# Altium PCB DoubleCam.PcbDoc
Units mil, origin at the board's own origin, x right, y up, seen from the top; angles counter-clockwise.
Board outline 2473.21 x 1456.69 mil, 2 copper layers (Top Layer, Bottom Layer); 22 components, 39 nets, 134 pads, 256 vias.
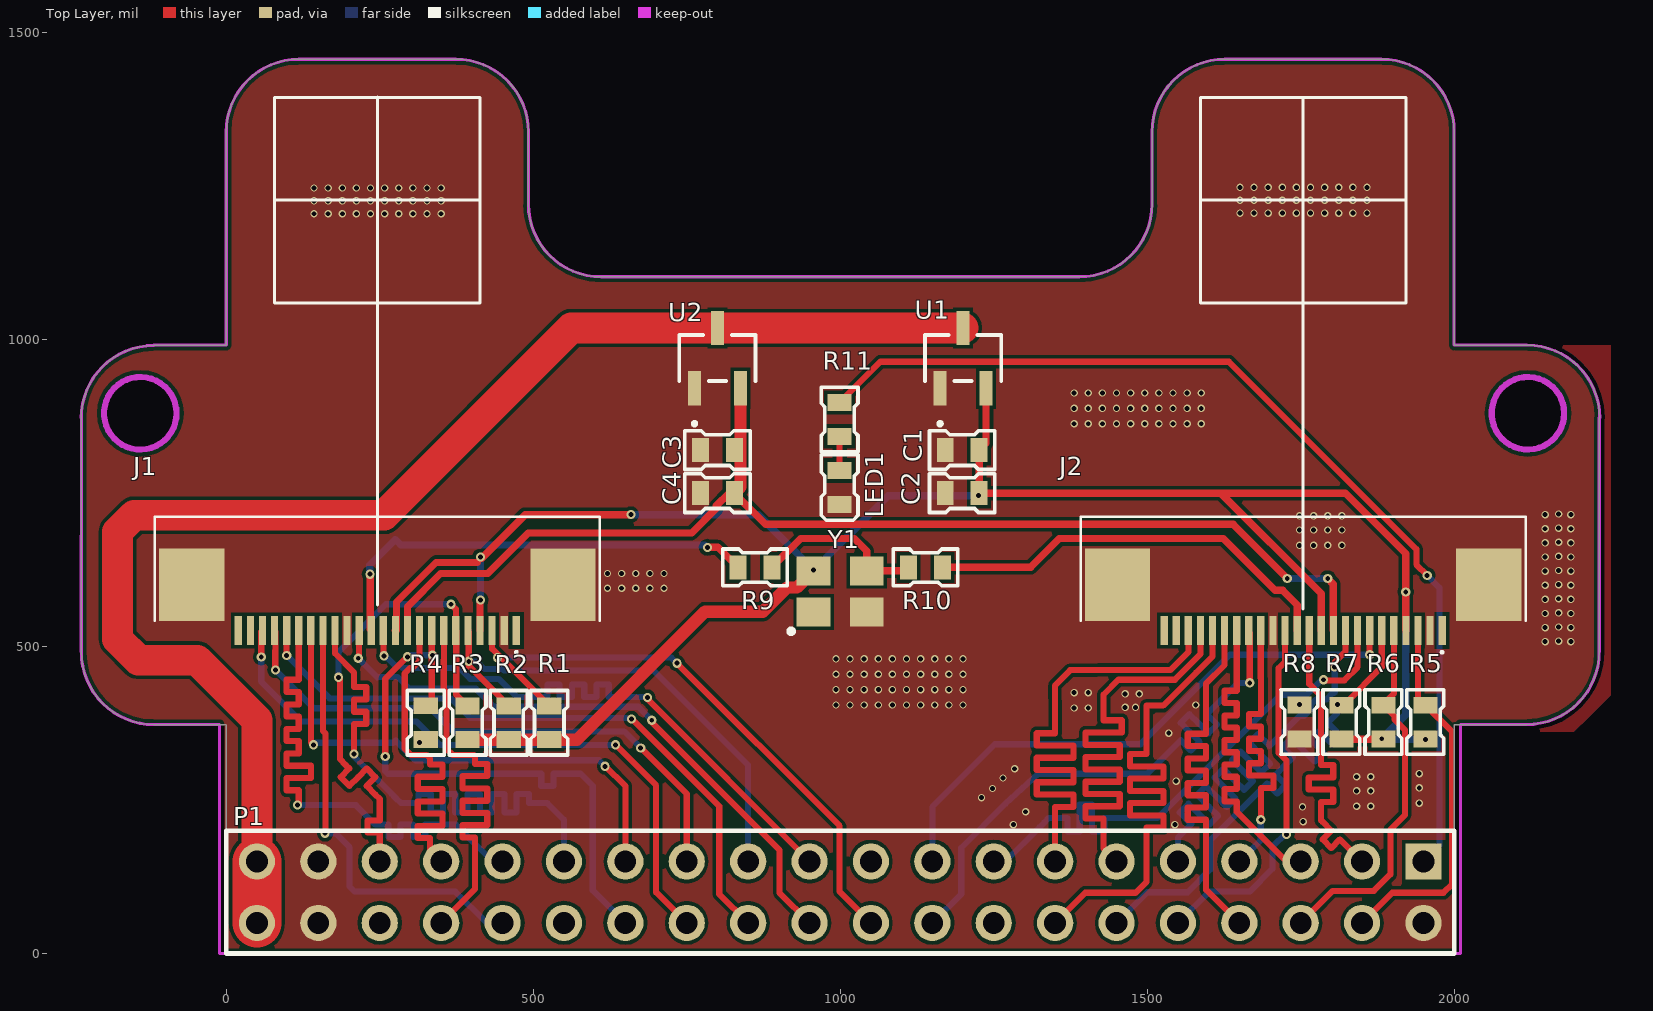
[diagram p0: Top Layer view]
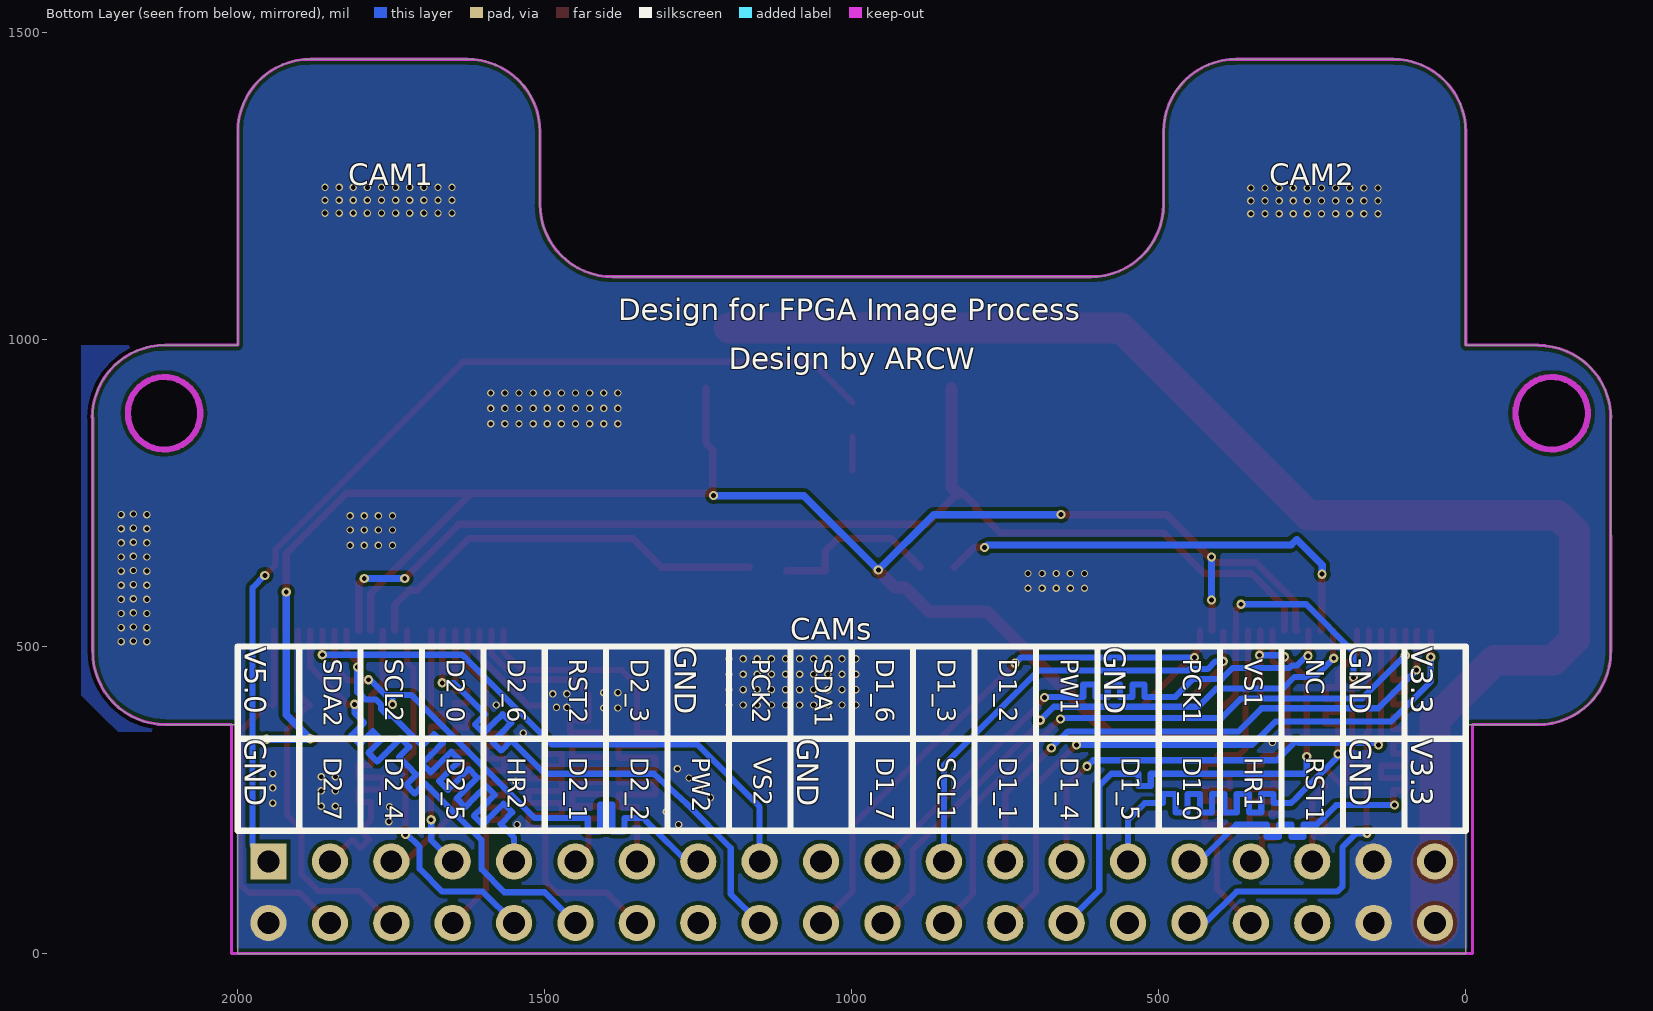
[diagram p1: Bottom Layer view, seen from below]
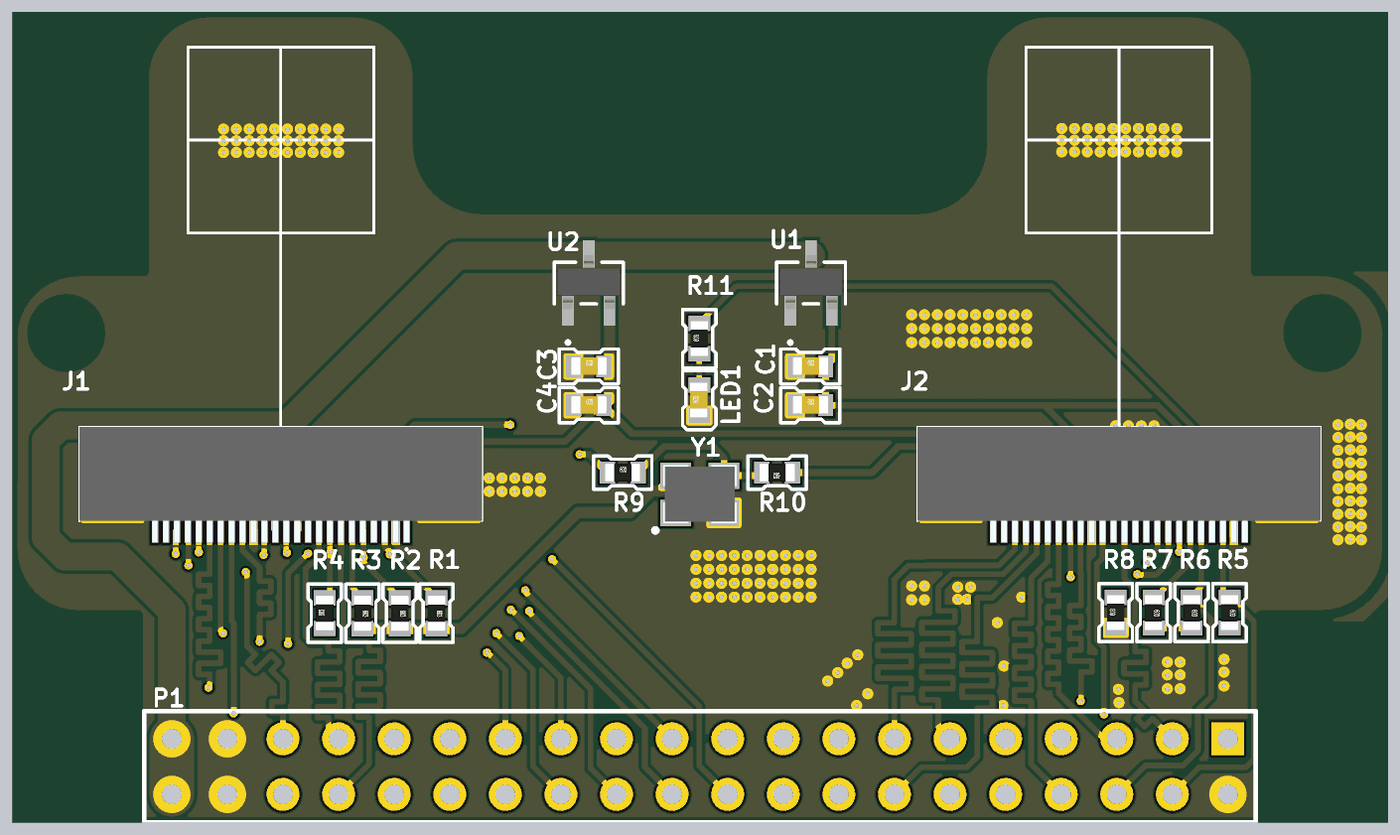
[diagram p2: 3D render of the assembled board from above, using the file's embedded part models]

## Layer stack, top to bottom
Top Solder: solder mask 0.4, Solder Resist, Dk 3.5
Top Layer: signal copper 1.4
Dielectric 1: dielectric 12.6, FR-4, Dk 4.8
Bottom Layer: signal copper 1.4
Bottom Solder: solder mask 0.4, Solder Resist, Dk 3.5

## Board outline
-117.89,372.89 cw(c-117.89,491) -236,491 -236.18,491 -235.98,872.43 -236.22,872.43 cw(c-118.11,872.43) -118.11,990.55 -118.11,990.91 0,990.91 0,1338.58 cw(c118.11,1338.58) 118.11,1456.69 374.02,1456.69 cw(c374.02,1338.58) 492.13,1338.58 492.13,1220.47 ccw(c610.24,1220.47) 610.24,1102.36 1389.76,1102.36 ccw(c1389.76,1220.47) 1507.87,1220.47 1507.87,1338.58 cw(c1625.99,1338.58) 1625.99,1456.69 1881.89,1456.69 cw(c1881.89,1338.58) 2000,1338.58 2000,990.91 2118.88,990.91 cw(c2118.88,872.8) 2236.99,872.8 2236.22,872.8 2236.22,491.11 2236.11,491.11 cw(c2118,491.11) 2118,373 2000,373 2000,0 0,0 0,373
cut-out: -140,820.94 cw(c-140,880) -199.06,880 cw(c-140,880) -140,939.06 cw(c-140,880) -80.94,880 cw(c-140,880)
cut-out: 2060.94,880 ccw(c2120,880) 2120,820.94 ccw(c2120,880) 2179.06,880 ccw(c2120,880) 2120,939.06 ccw(c2120,880)

## Design rules (kind name [scope] priority, off if disabled: settings)
Clearance [All] p1: gap=6 ignorepadtopadclearanceinfootprint=FALSE except(0: Arc-Hole Track-Hole SMDPad-Hole THPad-Hole Via-Hole Fill-Hole Poly-Hole Region-Hole Text-Hole)
PlaneConnect [All] p1: planeconnectstyle=Relief reliefexpansion=20 reliefentries=4 reliefconductorwidth=6 reliefairgap=10
PolygonConnect [All] p1: connectstyle=Direct reliefconductorwidth=10 reliefentries=4 polygonreliefangle="90 Angle" airgapwidth=10
RoutingTopology RoutingTopology_1 [All] p1: topology=Shortest
RoutingTopology [All] p2: topology=Shortest
RoutingVias [All] p1: holewidth=8 width=12 viastyle="Through Hole" minholewidth=6 minwidth=12 maxholewidth=28 maxwidth=50
SolderMaskExpansion [All] p1: expansion=4
Width [All] p1: maxlimit=200 minlimit=6 preferedwidth=10 minimp=50.000000 maximp=50.000000 favimp=50.000000
28 further rules are at their usual default settings.

## Classes and differential pairs
net class OV2: OV2_D0 OV2_D1 OV2_D2 OV2_D3 OV2_D4 OV2_D5 OV2_D6 OV2_D7 OV2_HREF OV2_PCLK OV2_PWDN OV2_RESET OV2_VSYNC
net class OV1: OV1_D0 OV1_D1 OV1_D2 OV1_D3 OV1_D4 OV1_D5 OV1_D6 OV1_D7 OV1_HREF OV1_PCLK OV1_PWDN OV1_RESET OV1_VSYNC

## Components (designator, comment, footprint, x,y, rotation, side; value= is the part's Value field where it differs from the comment)
C1 "Cap" 0603c 1198.58,820 r0 top
C2 "Cap" 0603c 1198.58,750 r0 top
C3 "Cap" 0603c 799.94,820 r0 top
C4 "Cap" 0603c 799.94,750 r0 top
J1 "FFC-24pin" FPC-24Pin 246,600 r180 top
J2 "FFC-24pin" FPC-24Pin 1754,600 r180 top
LED1 "red" 0603D 999,759 r90 top
P1 "Header 20X2" HDR2X20 1950,150 r180 top
R1 "Res1" 0603R 526,376 r270 top
R2 "Res1" 0603R 460,376 r270 top
R3 "Res1" 0603R 393,376 r270 top
R4 "Res1" 0603R 325,376 r90 top
R5 "Res1" 0603R 1953,377 r270 top
R6 "Res1" 0603R 1884.67,377 r270 top
R7 "Res1" 0603R 1816.33,377 r270 top
R8 "Res1" 0603R 1748,377 r90 top
R9 "Res1" 0603R 861,629 r0 top
R10 "Res1" 0603R 1139,629 r180 top
R11 "Res1" 0603R 999,870 r90 top
U1 "XC6206P282MR-G" SOT-23_TOR-M 1200,970 r0 top
U2 "XC6206P152MR-G" SOT-23_TOR-M 800,970 r0 top
Y1 "12MHz" X3225 1000,590 r0 top

## Footprints (in the part's own frame and the unit in brackets; to place one, negate y for a bottom-side part, rotate by r counter-clockwise, add the part's x,y. Pads: shape width x height; smd on the part's side, far side on the other; paste and mask are expansions set on the pad)
0603c [mm]
  rect 0.7x1 smd: 1(-0.699,0) 2(0.701,0)
  silkscreen extent -1.35,-0.8 1.35,0.8, body extent -0.79,-0.38 0.81,0.42, height 0.3
0603D [mm]
  rect 0.7x1 smd: 1(-0.699,0) 2(0.701,0)
  silkscreen extent -1.35,-0.76 1.35,0.76, body extent -0.79,-0.38 0.81,0.42, height 0.3
0603R [mm]
  rect 0.7x1 smd: 1(-0.699,0) 2(0.701,0)
  silkscreen extent -1.33,-0.76 1.33,0.76, body extent -0.8,-0.4 0.8,0.4, height 0.3
FPC-24Pin [mm]
  rect 0.3x1.2 smd: 1(-5.75,1.875) 2(-5.25,1.875) 3(-4.75,1.875) 4(-4.25,1.875) 5(-3.75,1.875) 6(-3.25,1.875) 7(-2.75,1.875) 8(-2.25,1.875) 9(-1.75,1.875) 10(-1.25,1.875) 11(-0.75,1.875) 12(-0.25,1.875) 13(0.25,1.875) 14(0.75,1.875) 15(1.25,1.875) 16(1.75,1.875) 17(2.25,1.875) 18(2.75,1.875) 19(3.25,1.875) 20(3.75,1.875) 21(4.25,1.875) 22(4.75,1.875) 23(5.25,1.875) 24(5.75,1.875)
  rect 2.7x3 smd: 25(-7.68,-0.025) 26(7.68,-0.025)
  silkscreen extent -9.2,-2.83 9.2,2.82, body extent -9.2,-2.83 9.2,2.44, height 2.1
HDR2X20 [mm] "Connector; Header; 20x2 Position"
  rect 1.5x1.5 hole 0.9: 1(0,0)
  round 1.5 hole 0.9: 2(0,2.54) 3(2.54,0) 4(2.54,2.54) 5(5.08,0) 6(5.08,2.54) 7(7.62,0) 8(7.62,2.54) 9(10.16,0) 10(10.16,2.54) 11(12.7,0) 12(12.7,2.54) 13(15.24,0) 14(15.24,2.54) 15(17.78,0) 16(17.78,2.54) 17(20.32,0) 18(20.32,2.54) 19(22.86,0) 20(22.86,2.54) 21(25.4,0) 22(25.4,2.54) 23(27.94,0) 24(27.94,2.54) 25(30.48,0) 26(30.48,2.54) 27(33.02,0) 28(33.02,2.54) 29(35.56,0) 30(35.56,2.54) 31(38.1,0) 32(38.1,2.54) 33(40.64,0) 34(40.64,2.54) 35(43.18,0) 36(43.18,2.54) 37(45.72,0) 38(45.72,2.54) 39(48.26,0) 40(48.26,2.54)
  silkscreen extent -1.27,-1.27 49.53,3.81
SOT-23_TOR-M [mil]
  rect 21x56 smd paste+0 mask+0: 1(-37.4,-49) 2(37.4,-49) 3(0,49)
  silkscreen extent -62,-110 62,38, body extent -57,-47 57,50, height 39
X3225 [mm]
  rect 1.4x1.2 smd: 1(-1.1,-0.85) 2(1.1,-0.85) 3(1.1,0.85) 4(-1.1,0.85)
  silkscreen extent -2.13,-1.75 -1.93,-1.55, body extent -1.68,-1.33 1.68,1.33, height 0.9

## Part data
C1 C2 C3 C4: "Capacitor"
J1 J2: "FFC连接器24pin"
LED1: library part LED
P1: "Header, 20-Pin, Dual row"
R1 R2 R3 R4 R5 R6 R7 R8 R9 R10 R11: "Resistor"
U1 U2: library part XC6206P332MR-G, "No Description Available"
Y1: library part XTAL_4

## Via types
v1: diameter 12, hole 8, Top Layer to Bottom Layer, 212 vias
v2: diameter 15, hole 8, Top Layer to Bottom Layer, 44 vias

## Nets (pads, with @x,y where several pads share a name; then routed paths per layer and width w, separated by ;. In a path a pad name is that pad's centre, name@x,y a point inside that pad or via, vN(x,y) a via of type N, cw(c..) or ccw(c..) an arc to the next point about the centre after c; other vN are vias at no path point)
GND: C1.1 C2.1 C3.1 C4.1 J1.2 J1.15 J1.25 J1.26 J2.2 J2.15 J2.25 J2.26 LED1.1 P1.2 P1.37 P1.38 R4.1 R8.1 U1.1 U2.1 Y1.2
  other v1: 1282,210 1545,210 1754,215 1302,231 1753,239 1841,240 1864,240 1943,245 1230,254 1841,265 1864,265 1248,269 1943,270 1547,281 1265,286 1841,288 1864,288 1943,293 1284,301 315,344 1535,359 1381,400 1404,400 1464,401 1481,401 993,405 1016,405 1039,405 1062,405 1085,405 1108,405 1131,405 1154,405 1177,405 1200,405 1579,405 1464,423 1487,423 1381,425 1404,425 993,430 1016,430 1039,430 1062,430 1085,430 1108,430 1131,430 1154,430 1177,430 1200,430 993,455 1016,455 1039,455 1062,455 1085,455 1108,455 1131,455 1154,455 1177,455 1200,455 993,480 1016,480 1039,480 1062,480 1085,480 1108,480 1131,480 1154,480 1177,480 1200,480 2148,508 2190,508 2170,509 2148,531 2190,531 2170,532 2148,554 2190,554 2170,555 2148,577 2190,577 2170,578 621,595 644,595 667,595 690,595 713,595 2148,600 2190,600 2170,601 621,619 644,619 667,619 690,619 713,619 2148,623 2190,623 2170,624 2148,646 2190,646 2170,647 1748,665 1771,665 1794,665 1817,665 2148,669 2190,669 2170,670 1748,690 1771,690 1794,690 1817,690 2148,692 2190,692 2170,693 1748,713 1771,713 1794,713 1817,713 2148,715 2190,715 2170,716 1381,863 1404,863 1427,863 1450,863 1473,863 1496,863 1519,863 1542,863 1565,863 1588,863 1381,888 1404,888 1427,888 1450,888 1473,888 1496,888 1519,888 1542,888 1565,888 1588,888 1381,913 1404,913 1427,913 1450,913 1473,913 1496,913 1519,913 1542,913 1565,913 1588,913 143,1205 166,1205 189,1205 212,1205 235,1205 258,1205 281,1205 304,1205 327,1205 350,1205 1651,1206 1674,1206 1697,1206 1720,1206 1743,1206 1766,1206 1789,1206 1812,1206 1835,1206 1858,1206 143,1226 166,1226 189,1226 212,1226 235,1226 258,1226 281,1226 304,1226 327,1226 350,1226 1651,1227 1674,1227 1697,1227 1720,1227 1743,1227 1766,1227 1789,1227 1812,1227 1835,1227 1858,1227 143,1247 166,1247 189,1247 212,1247 235,1247 258,1247 281,1247 304,1247 327,1247 350,1247 1651,1248 1674,1248 1697,1248 1720,1248 1743,1248 1766,1248 1789,1248 1812,1248 1835,1248 1858,1248
NetLED1_2: LED1.2 R11.1 | length 55.9
  Top Layer w10: LED1.2 R11.1
NetR9_2: R9.2 R10.2 Y1.3 | length 277.3
  Top Layer w12: R9.2 935.62,676 1023,676 1043.31,655.69 Y1.3 R10.2@1105.85,623.46
OV1_D0: J1.19 P1.31 | length 983.6
  Top Layer w10: v2(116,242) 118.05,244.05 118.05,256 118.05,266 98.05,266 98.05,286 118.05,286 138.05,286 138.05,306 118.05,306 98.05,306 98.05,326 118.05,326 118.05,346 98.05,346 98.05,366 118.05,366 118.05,386 98.05,386 98.05,406 118.05,406 118.05,426 98.05,426 98.05,446 118.05,446 118.05,466 118.05,486 118.05,498 J1.19
  Bottom Layer w10: v2(116,242) 211,242 240.5,212.5 ; 235.93,217.07 243,210 244,210 264,210 264,190 284,190 284,210 304,210 304,190 324,190 324,210 344,210 364,210 374,210 434,150 P1.31
OV1_D1: J1.21 P1.25 | length 928.5
  Top Layer w10: J1.21 80,524.86 80,493.58 79.86,493.44 79.86,462.14 v2(80,462) ; v2(675,335) 750,260 P1.25
  Bottom Layer w10: v2(80,462) 142.5,399.5 332.5,399.5 370,362 648,362 v2(675,335)
OV1_D2: J1.22 P1.26 | length 1038.9
  Top Layer w10: v2(57,483) J1.22@57,524.19 ; v2(634,340) 700,274 700,100 P1.26
  Bottom Layer w10: v2(57,483) 57,443 122,378 310,378 348,340 v2(634,340)
OV1_D3: J1.20 P1.24 | length 1057.3
  Top Layer w10: v2(98.36,485.64) J1.20 ; v2@660.5,382.5 803,240 803,97 P1.24
  Bottom Layer w10: v2(98.36,485.64) 168.5,415.5 365.5,415.5 397,384 660,384 v2(660,382)
OV1_D4: J1.18 P1.27 | length 852.2
  Top Layer w10: J1.18 137.73,344.27 v2(142,340) ; v2@617.5,305.5 650,273 P1.27
  Bottom Layer w10: v2(142,340) 145.5,343.5 272.5,343.5 276,347 308,315 607,315 v2(617,305)
OV1_D5: J1.16 P1.29 | length 1025.2
  Top Layer w10: J1.16 177.1,488.9 208,458 208,454 208,434 228,434 228,414 208,414 208,394 228,394 228,374 208,374 208,354 208,344 v2(208,325)
  Bottom Layer w10: v2(208,325) 208,321.78 272.89,256.89 ; 269.32,260.46 276.39,253.39 284.78,245 293,245 313,245 313,260 333,260 333,245 333,230 353,230 353,245 353,260 373,260 373,245 373,230 393,230 393,245 393,260 413,260 413,245 413,230 433,230 433,245 433,260 453,260 453,245 453,230 473,230 473,245 473,260 493,260 493,245 513,245 523,245 550,218 P1.29
OV1_D6: J1.14 P1.22 | length 1001.6
  Top Layer w10: v2(215,481) 216.47,482.47 J1.14 ; v2@691.5,378.5 901,169 901,99 P1.22
  Bottom Layer w10: v2(215,481) 246,450 246.5,450.5 279.11,450.5 298.11,431.5 406.5,431.5 436,402 671,402 v2(693,380)
OV1_D7: J1.12 P1.21 | length 997.1
  Top Layer w10: J1.12 255.84,486.16 v2(257,485) ; v2@684.5,415.5 P1.21
  Bottom Layer w10: v2(257,485) 257,487 275,469 283.23,469 287.34,464.9 379.94,464.9 397.34,447.5 443.5,447.5 473,418 483,418 503,418 523,418 523,438 543,438 543,418 563,418 563,438 583,438 583,418 603,418 603,438 623,438 623,418 643,418 653,418 685,418 v2(686,417)
OV1_HREF: J1.9 P1.33 | length 676
  Top Layer w10: J1.9 314.9,477.13 302.66,464.9 299.13,464.9 290.69,456.45 290.69,333.79 300.76,323.72 326.28,323.72 332,318 332,308 352,308 352,288 332,288 312,288 312,268 332,268 352,268 352,248 332,248 312,248 312,228 332,228 352,228 352,208 332,208 312,208 312,188 332,188 332,178 332,154 336,150 P1.33
OV1_PCLK: J1.17 P1.32 | length 719
  Top Layer w10: J1.17 157.42,362.83 161.5,358.75 161.5,196.5 v2(161,196)
  Bottom Layer w10: v2(161,196) 178,196 201,173 201,109 209,101 373,101 424,50 P1.32
OV1_PWDN: J1.8 P1.28 R4.2 | length 983.3
  Top Layer w10: v2(259,321) 259,447.4 v2(295,483.4) ; R4.2@334.58,413.2 J1.8
  Bottom Layer w10: v2(259,321) 259,296.94 262.94,293 283,293 293,293 313,293 333,293 353,293 373,293 393,293 413,293 433,293 453,293 473,293 493,293 513,293 513,273 533,273 533,293 553,293 573,293 577,293 597,273 597,103 P1.28 ; v2@299.89,486 v2(336,486)
OV1_RESET: J1.6 P1.35 R3.1 | length 881.3
  Top Layer w10: v2(183,450) 185,448 185,317 195,307 200.5,301.5 186.36,287.36 200.5,273.21 214.64,287.36 228.79,301.5 242.93,287.36 228.79,273.21 242.93,259.07 250,252 250,237 250,217 230,217 230,197 250,197 250,187 P1.35 ; v2(366,569) 373.95,561.05 J1.6 374.69,525.45 374.69,421.81 R3.1
  Bottom Layer w10: v2(183,450) 183,492 260,569 v2(366,569)
OV1_SCL: J1.5 P1.23 R2.1 | length 822.7
  Top Layer w10: 395,468.5 R2.1 ; v2(395,476) J1.5@395,524.82
  Bottom Layer w10: v2(395,476) 408,476 420.5,463.5 450.13,463.5 452.63,461 696,461 850,307 P1.23
OV1_SDA: J1.3 P1.20 R1.1 | length 1010.8
  Top Layer w10: J1.3 433.01,496.49 R1.1 ; v2(734,473) 999,208 999,101 P1.20
  Bottom Layer w10: v2(442,482) 725,482 v2(734,473)
OV1_VSYNC: J1.7 P1.34 | length 780.5
  Top Layer w10: P1.34 405,105 405,179 405,189 385,189 385,209 405,209 425,209 425,229 405,229 385,229 385,249 405,249 425,249 425,269 405,269 385,269 385,289 405,289 425,289 425,309 405,309 405,315 405,322 403.4,323.6 368.76,323.6 358.69,333.68 358.69,426.25 354.27,430.67 354.27,478.1 354.5,478.34 354.5,525.95 J1.7
OV1_XCLK: J1.13 R9.1 | length 743.2
  Top Layer w12: v2(234,618) 234.38,617.62 234.38,527.96 J1.13 ; v2(783.58,661.61) 800.89,661.61 R9.1
  Bottom Layer w12: v2(234,618) 234,633 275.5,674.5 284.5,665.5 779.7,665.5 v2(783.58,661.61)
OV2_D0: J2.19 P1.8 | length 751
  Top Layer w10: J2.19 1626.05,470.05 1596,440 1596,409 1596,398 1596,378 1596,358 1566,358 1566,338 1596,338 1596,318 1566,318 1566,298 1596,298 1596,278 1566,278 1566,258 1596,258 1596,238 1566,238 1566,218 1596,218 1596,198 1596,188 1596,177 1596,157 1596,147 1596,104 P1.8
OV2_D1: J2.21 P1.11 | length 957.3
  Top Layer w10: P1.11 1429,171 1429,184 1429,210 1429,220 1399.46,220 1399.46,240 1429,240 1455.3,240 1455.3,260 1429,260 1399.46,260 1399.46,280 1429,280 1455.3,280 1455.3,300 1429,300 1399.46,300 1399.46,320 1429,320 1455.3,320 1455.3,340 1429,340 1399.46,340 1399.46,360 1429,360 1458.54,360 1458.54,380 1429,380 1429,407 1429,415 1429,422 1453,446 1545,446 1586.68,487.68 J2.21
OV2_D2: J2.22 P1.13 | length 921.6
  Top Layer w10: P1.13 1350,209 1350,219 1350,239 1380,239 1380,259 1350,259 1320,259 1320,279 1350,279 1380,279 1380,299 1350,299 1320,299 1320,319 1350,319 1380,319 1380,339 1350,339 1320,339 1320,359 1350,359 1350,379 1350,393 1349.5,436.5 1374.5,461.5 1419,462 1538,462 1566.99,490.99 J2.22
OV2_D3: J2.20 P1.14 | length 973.2
  Top Layer w10: P1.14 1399,99 1481,99 1499,117 1499,175 1499,185 1499,205 1526.24,205 1526.24,225 1499,225 1471.76,225 1471.76,245 1499,245 1526.24,245 1526.24,265 1499,265 1471.76,265 1471.76,285 1499,285 1526.24,285 1526.24,305 1499,305 1471.76,305 1471.76,325 1499,325 1499,377 1498.84,403.84 1525.84,403.84 1579.52,457.52 1606.36,484.36 J2.20
OV2_D4: J2.18 P1.5 | length 639.6
  Top Layer w10: J2.18 1645.73,493 1645.73,474 1645.73,468 1645.73,448 1645.73,428 1625.73,428 1625.73,408 1645.73,408 1645.73,388 1625.73,388 1625.73,368 1645.73,368 1645.73,348 1625.73,348 1625.73,328 1645.73,328 1645.73,308 1625.73,308 1625.73,288 1645.73,288 1645.73,268 1625.73,268 1625.73,248 1645.73,248 1645.73,238 1645.73,231.1 1667.42,209.42 1734.84,142 1742,142 P1.5
OV2_D5: J2.16 P1.7 | length 551.1
  Top Layer w10: v2(1685,218) 1685.5,218.5 1685.5,240 1685.5,250 1685.5,270 1705.5,270 1705.5,290 1685.5,290 1665.5,290 1665.5,310 1685.5,310 1685.5,330 1665.5,330 1665.5,350 1685.5,350 1685.5,370 1665.5,370 1665.5,390 1685.5,390 1685.5,410 1685.5,430 1685.5,432 1685.5,446 1685.5,448.66 1685,449.16 1685,526.08 J2.16
  Bottom Layer w10: P1.7 1685,185 v2(1685,218)
OV2_D6: J2.14 P1.10 | length 603.9
  Top Layer w10: J2.14 1724.47,475.47 1714,465 1714,327 1727,314 v2(1727,194)
  Bottom Layer w10: P1.10 1601,101 1667,101 1704,138 1704,174 1727,197 v2(1727,194)
OV2_D7: J2.12 P1.3 | length 571.9
  Top Layer w10: J2.12 1763.84,439.16 1783,420 1783,389 1783,387 1783,367 1783,347 1783,327 1783,307 1803,307 1803,287 1783,287 1763,287 1763,267 1783,267 1803,267 1803,247 1783,247 1783,227 1783,217 1785.64,214.36 1799.79,200.21 1785.64,186.07 1799.79,171.93 1813.93,186.07 1821,179 P1.3
OV2_HREF: J2.9 P1.9 | length 943.3
  Top Layer w10: v2(1805,467) 1805,474 1822.9,491.9 J2.9
  Bottom Layer w10: P1.9 1550,189 1565,204 1572.07,211.07 1553.09,230.05 1567.23,244.2 1586.21,225.21 1601.2,210.23 1615.34,224.37 1600.36,239.36 1581.37,258.34 1595.52,272.48 1614.5,253.5 1629.48,238.52 1643.62,252.66 1628.64,267.64 1609.66,286.62 1623.8,300.76 1642.78,281.78 1657.76,266.8 1671.91,280.94 1656.92,295.92 1637.94,314.91 1652.08,329.05 1671.07,310.07 1686.05,295.08 1700.19,309.23 1685.21,324.21 1666.23,343.19 1680.37,357.33 1699.35,338.35 1748.5,387.5 1755.66,387.5 1766.5,398.34 1766.5,405.5 1774.66,413.66 1791.5,413.66 1802.34,424.5 1804.5,424.5 1806,426 1805.5,426.5 1805.5,466.5 v2(1805,467)
OV2_PCLK: J2.17 P1.18 | length 943.3
  Top Layer w10: J2.17 1666,525.6 1665,524.6 1667,522.6 v2(1667,441)
  Bottom Layer w10: P1.18 1197,97 1197,172 1269,244 1322.26,293 1478,293 1500,293 1554.5,347.5 1571.29,330.72 1585.43,344.86 1568.64,361.64 1554.5,375.79 1568.64,389.93 1582.79,375.79 1599.57,359 1613.72,373.14 1596.93,389.93 1604,397 1648,441 v2(1667,441)
OV2_PWDN: J2.8 P1.15 R8.2 | length 929.3
  Top Layer w10: v2(1787,446) 1788,445 1821,445 1842.58,466.58 J2.8
  Bottom Layer w10: P1.15 1269,150 1325,206 1332.07,213.07 1340,221 1350,221 1370,221 1370,198.97 1390,198.97 1390,221 1390,243.03 1410,243.03 1410,221 1410,198.97 1430,198.97 1430,221 1517,221 1717,421 1759.37,421 1784.37,446 v2(1787,446) ; v2(1748,406) 1748,419
OV2_RESET: J2.6 P1.12 R7.1 | length 905.7
  Top Layer w10: R7.1@1822.33,404.5 1822.33,407.33 1881.95,466.95 J2.6
  Bottom Layer w10: P1.12 1500,100 1566,100 1603,137 1603,185 1617.5,199.5 1624.57,206.57 1638.71,220.71 1652.86,234.86 1667,249 1681.14,263.14 1695.28,277.28 1711.86,260.7 1726,274.85 1709.42,291.42 1723.57,305.57 1737.71,319.71 1720.52,336.9 1734.66,351.04 1751.85,333.85 1773.06,312.64 1787.21,326.78 1765.99,347.99 1780.13,362.13 1801.35,340.92 1815.49,355.06 1794.28,376.28 1808.42,390.42 1810,392 v2(1810,406)
OV2_SCL: J2.5 P1.6 R6.1 | length 608.3
  Top Layer w10: P1.6 1802,102 1869,102 1896,129 1896,202 1920,226 1920,364 1903,381 1903,386.17 R6.1 ; R6.1@1882.67,404.5 1901.64,423.47 J2.5
OV2_SDA: J2.3 P1.4 R5.1 | length 604.6
  Top Layer w10: P1.4 1899,99 1982.5,99 1996.5,113 1996.5,361 R5.1 ; J2.3 1941.01,406.49 R5.1@1943,404.5
OV2_VSYNC: J2.7 P1.17 | length 943.3
  Top Layer w10: v2(1862.27,486.73) J2.7
  Bottom Layer w10: P1.17 1150,239 1252,341 1489,341 1634.73,486.73 v2(1862.27,486.73)
OV2_XCLK: J2.13 R10.1 | length 683.6
  Top Layer w12: R10.1 1310,629 1357,676 1624,676 1708.5,591.5 1720.5,591.5 1744.16,567.84 J2.13
VCC1.5: C3.2 C4.2 J1.10 J2.10 U2.2 | length 1938.7
  Top Layer w12: J1.10 295.21,565.21 349,619 426,619 492,685 757.88,685 798.22,725.34 798.22,729.22 819,750 C4.2 878.56,699 1640,699 v2(1728,611) ; v2(1794,611) 1803.21,601.79 J2.10
  Top Layer w20: C4.2 837.4,759.84 U2.2
  Bottom Layer w12: v2(1728,611) 1729,612 1730,611 v2(1794,611)
VCC2.8: C1.2 C2.2 J1.4 J1.11 J2.4 J2.11 R1.2 R2.2 R3.2 R5.2 R6.2 R7.2 U1.2 Y1.4 | length 3654.5
  Top Layer w12: J1.11 277.21,526.18 277.21,572.67 341.54,637 409,637 ; J1.4 413.32,575.32 v2(414,576) ; v2@416,644 487,715 v2(659,715) ; Y1.4 v2(956.69,624.69) ; v2(1225,746) C2.2@1226.2,747.2 ; U1.2 1237.4,831.2 C1.2 C2.2 1620,750 ; J2.11 1783.53,586.47 1620,750 ; R7.2 R6.2@1882,349.38 ; J2.4 1921.32,651.68 1823,750 1620,750 ; v2(1953,349) R5.2
  Top Layer w20: R3.2 R2.2 R1.2 571.38,348.38 780,557 873.98,557 913.13,596.16 929.39,596.16 Y1.4
  Bottom Layer w12: v2(414,576) v2(414,646) ; v2(659,715) 866.39,715 v2(956.69,624.69) 1078,746 v2(1225,746) ; v2(1921,589) 1921,389 v2(1882,350) 1883,349 v2(1953,349)
VCC3.3: P1.39 P1.40 U1.3 U2.3 | length 2301.5
  Top Layer w50: P1.39 50,380.59 -47.41,478 -143,478 -177,512 -177,687 -150,714 257,714 562,1019 U2.3 U1.3
  Top Layer w80: P1.40 P1.39
VCC5V: P1.1 R11.2 | length 1628.4
  Top Layer w10: R11.2 1065.38,964 1633.04,964 1938.32,658.72 1938.32,633.68 v2(1956,616)
  Bottom Layer w10: P1.1 1976,176 1976,596 v2(1956,616)
pads on no net: J1.1 J1.23 J1.24 J2.1 J2.23 J2.24 P1.16 P1.19 P1.30 P1.36 Y1.1

## Polygon pours and split planes (outlines as drawn)
GND on Top Layer "Top Layer-No Net" (solid, pour order 4): 1,1451 485,1451 496,1440 493.22,1437.22 493.22,1201.94 493.22,1195.07 582.66,1105.63 585.56,1102.73 1399.03,1102.73 1421.31,1102.73 1502.44,1183.86 1508,1189.42 1508,1383 1508,1392 1575,1459 1583,1451 2010,1451 2010,995 2014,991 2255,991 2255,421 2218,384 2195,361 2020,361 2020,10 2010,0 -11,0 -11,373 -14,370 -169,370 -169,382 -243,456 -243,926 -241,926 -161,1006 -154,999 -5,999
GND on Bottom Layer "Top Layer-No Net" (solid, pour order 3): 1,1451 485,1451 496,1440 493.22,1437.22 493.22,1201.94 493.22,1195.07 582.66,1105.63 585.56,1102.73 1399.03,1102.73 1421.31,1102.73 1502.44,1183.86 1508,1189.42 1508,1383 1508,1392 1575,1459 1583,1451 2010,1451 2010,995 2014,991 2255,991 2255,421 2218,384 2195,361 2020,361 2020,10 2010,0 -11,0 -11,373 -14,370 -169,370 -169,382 -243,456 -243,926 -241,926 -161,1006 -154,999 -5,999

## Keep-outs
Keep-Out Layer:
  circle w10: c2120,880 r59.06
  circle w10: c-140,880 r59.06
  lines w5: -236.22,872.43 cw(c-118.11,872.43) -118.11,990.55 ; -236.18,491 -235.98,872.43 ; -236,491 ccw(c-117.89,491) -117.89,372.89 ; -118.11,990.91 0,990.91 0,1338.58 cw(c118.11,1338.58) 118.11,1456.69 374.02,1456.69 cw(c374.02,1338.58) 492.13,1338.58 492.13,1220.47 ccw(c610.24,1220.47) 610.24,1102.36 1389.76,1102.36 ccw(c1389.76,1220.47) 1507.87,1220.47 1507.87,1338.58 cw(c1625.99,1338.58) 1625.99,1456.69 1881.89,1456.69 cw(c1881.89,1338.58) 2000,1338.58 2000,990.91 ; -117.89,373 -11,373 -11,0 2010,0 2010,373 2118,373 ccw(c2118,491.11) 2236.11,491.11 ; 2000.77,990.91 2118.88,990.91 cw(c2118.88,872.8) 2236.99,872.8 ; 2236.22,491.11 2236.22,872.8

## Silkscreen, mask and mechanical layers (free items; w line width, h text height)
Top Overlay:
  lines w5: 78.74,1227.29 413.39,1227.29 ; 246.06,567.85 246.06,1395 ; 1586.62,1227.29 1921.26,1227.29 ; 1753.94,561.02 1753.94,1394.62 ; 78.74,1059.97 78.74,1394.62 413.39,1394.62 413.39,1059.97 78.74,1059.97 ; 1586.62,1059.97 1921.26,1059.97 1921.26,1394.62 1586.62,1394.62 1586.62,1059.97
Bottom Overlay:
  lines w10: 100,200 100,350 100,500 ; 200,200 200,350 200,500 ; 300,200 300,350 300,500 ; 400,200 400,350 400,500 ; 500,200 500,350 500,500 ; 600,200 600,350 600,500 ; 700,200 700,350 700,500 ; 800,200 800,350 800,500 ; 900,200 900,350 900,500 ; 1000,200 1000,350 1000,500 ; 1100,200 1100,350 1100,500 ; 1200,200 1200,350 1200,500 ; 1300,200 1300,350 1300,500 ; 1400,200 1400,350 1400,500 ; 1500,200 1500,350 1500,500 ; 1600,200 1600,350 1600,500 ; 1700,200 1700,350 1700,500 ; 1800,200 1800,350 1800,500 ; 1900,200 1900,350 1900,500 ; 0,350 0,200 2000,200 2000,350 ; 0,350 2000,350 ; 0,350 0,500 2000,500 2000,350
  text "CAM2" at 320,1240 h60
  text "CAM1" at 1820,1240 h60
  text "Design for FPGA Image Process" at 1380,1020 h60
  text "Design by ARCW" at 1200,940 h60
  text "V3.3" at 100,500 h60 r90
  text "GND" at 200,500 h60 r90
  text "GND" at 600,500 h60 r90
  text "CAMs" at 1100,500 h60
  text "GND" at 1300,500 h60 r90
  text "V5.0" at 2000,500 h60 r90
  text "NC" at 260,480 h30 r90
  text "VS1" at 360,480 h30 r90
  text "PCK1" at 460,480 h30 r90
  text "PW1" at 660,480 h30 r90
  text "D1_2" at 760,480 h30 r90
  text "D1_3" at 860,480 h30 r90
  text "D1_6" at 960,480 h30 r90
  text "SDA1" at 1060,480 h30 r90
  text "PCK2" at 1162,480 h30 r90
  text "D2_3" at 1360,480 h30 r90
  text "RST2" at 1460,480 h30 r90
  text "D2_6" at 1560,480 h30 r90
  text "D2_0" at 1660,480 h30 r90
  text "SCL2" at 1760,480 h30 r90
  text "SDA2" at 1860,480 h30 r90
  text "V3.3" at 100,350 h60 r90
  text "GND" at 200,350 h60 r90
  text "GND" at 1100,350 h60 r90
  text "GND" at 2000,350 h60 r90
  text "RST1" at 260,320 h30 r90
  text "HR1" at 360,320 h30 r90
  text "D1_0" at 460,320 h30 r90
  text "D1_5" at 560,320 h30 r90
  text "D1_5" at 560,320 h30 r90
  text "D1_4" at 660,320 h30 r90
  text "D1_1" at 760,320 h30 r90
  text "SCL1" at 860,320 h30 r90
  text "D1_7" at 960,320 h30 r90
  text "VS2" at 1160,320 h30 r90
  text "PW2" at 1260,320 h30 r90
  text "D2_2" at 1360,320 h30 r90
  text "D2_1" at 1460,320 h30 r90
  text "HR2" at 1560,320 h30 r90
  text "D2_5" at 1660,320 h30 r90
  text "D2_4" at 1760,320 h30 r90
  text "D2_7" at 1860,320 h30 r90